# Altium PCB Tfinal.PcbDoc (part 3 of 3)
Units mm, origin at the board's own origin, x right, y up, seen from the top; angles counter-clockwise.
Board outline 152.4 x 101.6 mm, 2 copper layers (Top Layer, Bottom Layer); 134 components, 112 nets, 404 pads, 12 vias.
Unrouted connection lines stored in the file: 100.
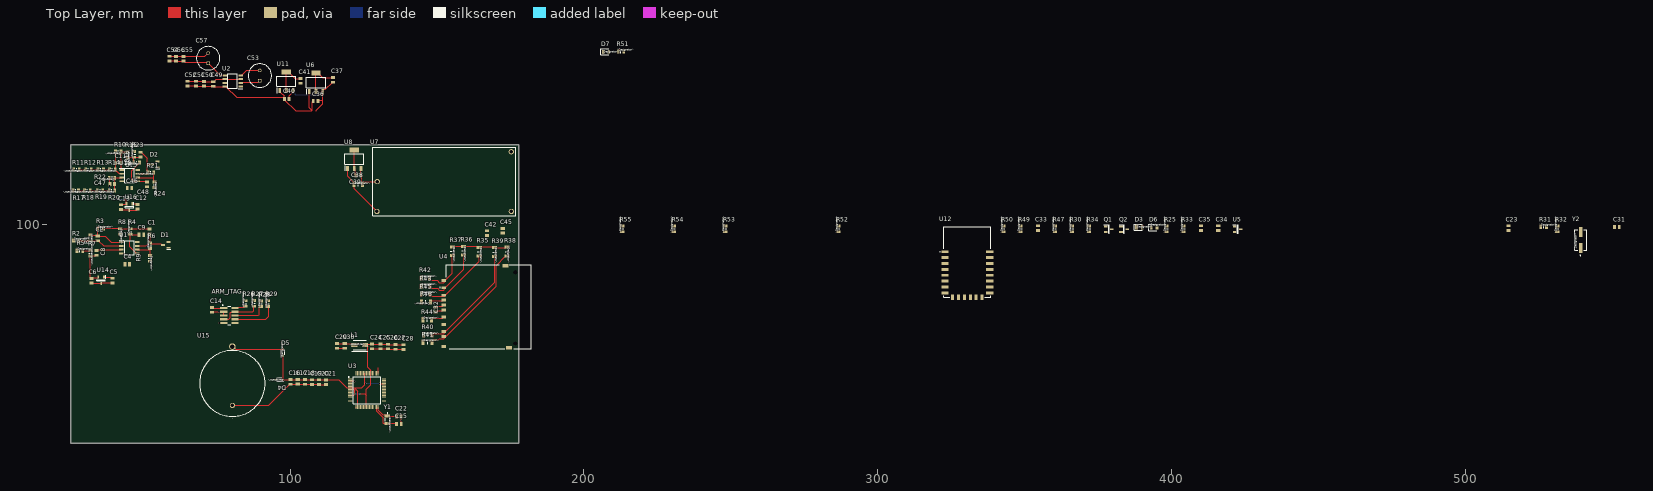
[diagram p0: Top Layer view]

## Via types
v1: diameter 0.6, hole 0.6, Top Layer to Bottom Layer, tented top, 7 vias
v2: diameter 0.6, hole 0.406, Top Layer to Bottom Layer, tented top, 5 vias

## Nets (pads, with @x,y where several pads share a name; then routed paths per layer and width w, separated by ;. In a path a pad name is that pad's centre, name@x,y a point inside that pad or via, vN(x,y) a via of type N, cw(c..) or ccw(c..) an arc to the next point about the centre after c; other vN are vias at no path point) (continued)
NetC24_23: (continued)
  Top Layer w0.254: U3.12 121.616,41.728 121.996,42.108 121.996,43.409 121.677,43.728 121.424,43.728 U3.8 ; v2(123.8,42.266) 125.425,42.266 125.986,41.705 ; U3.24 125.986,41.705 ; C28.1 135.992,58.922 C27.1 133.426,58.998 C26.1 130.785,59.125 C25.1 127.965,59.176 C24.1 125.851,59.151 L1.1 125.977,58.826 126.475,58.328 126.475,51.345 127.486,50.334 U3.54 127.486,45.317 125.986,43.817 125.986,41.705
  Bottom Layer w0.254: v2(122.149,42.266) v2(123.8,42.266)
NetC29_23: C29.1 C30.1 L1.2 U3.64 | length 6.1
  Top Layer w0.254: C29.1 118.587,59.34 C30.1 121.344,59.309 L1.2
NetC47_22: C47.2 R20.1 R22.1 U13.3 | length 6.8
  Top Layer w0.254: R20.1 40.381,113.599 C47.2 40.315,115.626 R22.1 40.513,115.824 U13.3
NetC48_22: C48.2 R16.1 U13.5 | length 12.8
  Top Layer w0.254: R16.1@49.116,120.556 R16.1 48.768,120.679 46.228,118.139 46.228,115.24 46.914,114.554 U13.5 51.105,114.554 C48.2
NetC53_24: C53.2 U2.4 | length 7.3
  Top Layer w0.254: U2.4 83.617,150.571 85.288,152.242 C53.2
NetC53_25: C53.1 U2.2 | length 6.9
  Top Layer w0.254: U2.2 83.617,148.031 83.855,148.269 89.265,148.269 C53.1
NetD3_1: D3.1 Q1.3
NetD3_2: D3.2 R25.2
NetD5_2: D5.2 U15.2 | length 17.6
  Top Layer w0.254: U15.2 80.704,58.303 81.613,57.395 D5.2
NetD6_1: D6.1 Q2.3
NetD6_2: D6.2 R33.1
NetD7_2: D7.2 R51.1
NetQ1_1: Q1.1 R30.2
NetQ2_1: Q2.1 R34.2
NetR6_1: R6.1 R9.1 U1.6 | length 6.9
  Top Layer w0.254: U1.6 48.09,91.321 52.027,91.321 R6.1 R9.1
NetR11_1: R11.1 R12.2 | length 2.2
  Top Layer w0.254: R11.1 R12.2
NetR12_1: R12.1 R13.2 | length 2.3
  Top Layer w0.254: R12.1 R13.2
NetR13_1: R13.1 R14.2 | length 2
  Top Layer w0.254: R13.1 R14.2
NetR17_1: R17.1 R18.2 | length 2
  Top Layer w0.254: R17.1 R18.2
NetR18_1: R18.1 R19.2 | length 2.4
  Top Layer w0.254: R18.1 R19.2
NetR19_1: R19.1 R20.2 | length 2.2
  Top Layer w0.254: R19.1 R20.2
NetR21_1: R21.1 R24.1 U13.6 | length 8.8
  Top Layer w0.254: U13.6 48.209,115.748 53.614,115.748 ; R21.1 53.614,115.748 ; R24.1 53.614,114.686 53.614,115.748
NetR31_2: R31.2 U3.50
NetR32_2: R32.2 U3.40
NetR35_2: R35.2 R45.2 U4.2 | length 24.1
  Top Layer w0.254: R45.2 147.65,75.763 148.023,75.39 150.434,75.39 150.468,75.356 152.595,75.356 152.595,75.606 164.389,87.4 R35.2
NetR36_2: R36.2 R43.2 U4.1 | length 20.6
  Top Layer w0.254: R43.2 147.599,78.481 147.972,78.108 150.266,78.108 150.841,77.533 151.972,77.533 152.222,77.533 152.595,77.906 152.595,78.156 159.055,84.616 R36.2 R36.2@159.428,89.795
NetR37_2: R37.2 R42.2 U4.9 | length 16.5
  Top Layer w0.254: R42.2@147.577,81.546 147.577,81.171 147.896,80.851 150.023,80.851 150.841,80.033 151.972,80.033 152.222,80.033 152.595,80.406 152.595,80.656 155.253,83.315 R37.2 R37.2@155.627,88.885
NetR38_2: R38.2 R41.2 U4.8 | length 42.4
  Top Layer w0.254: R41.2@148.57,59.549 R41.2 148.313,60.181 148.686,60.554 150.487,60.554 150.841,60.908 151.972,60.908 152.222,60.908 170.129,78.815 170.129,85.807 173.463,89.14 R38.2
NetR39_2: R39.2 R40.2 U4.7 | length 37.9
  Top Layer w0.254: R40.2@148.621,62.038 R40.2 148.677,62.608 151.972,62.608 152.222,62.608 152.595,62.981 152.595,63.231 169.621,80.257 R39.2
NetR44_2: R44.2 U4.5 | length 4
  Top Layer w0.254: R44.2 148.728,67.97 U4.5@151.972,67.97
NetR46_1: R46.1 U4.CD1 | length 4.4
  Top Layer w0.254: R46.1 148.274,73.965 U4.CD1@151.972,73.965
NetR47_1: R47.1
NetR49_2: R49.2
NetR50_2: R50.2
NetR52_1: R52.1 U12.1
NetR53_1: R53.1 U12.3
NetR54_2: R54.2 U12.18
NetR55_2: R55.2 U12.16
PA0: U3.48
PA1: U3.47
PA2: U3.44
PA3: U3.43
PA4: U3.36
PA5: U3.35
PA6: U3.34
PA15: U3.20
PA23: U3.15
PB8: U3.61
PB9: U3.62
RESET: ARM_JTAG.10 U3.39
"SD CD": R46.2 U3.25
"SD MCCDA": R45.1 U3.38
"SD MCCK": R44.1 U3.41
"SD MCDA0": R40.1 U3.42 | length 0.4
  Top Layer w0.254: R40.1 R40.1@145.364,62.67
"SD MCDA1": R41.1 U3.52
"SD MCDA2": R42.1 U3.26
"SD MCDA3": R43.1 U3.37 | length 0.9
  Top Layer w0.254: R43.1@144.226,78.108 144.599,78.481 R43.1
"SPI MISO": U3.27
"SPI MOSI": U3.22
"SPI NPCS0": U3.28
"SPI SPCK": U3.21
TCK: ARM_JTAG.4 ARM_JTAG.7 R27.1 U3.53 | length 13.1
  Top Layer w0.254: ARM_JTAG.7 77.47,67.64 79.175,67.64 79.581,68.046 79.581,69.771 79.764,69.953 80.323,69.953 ARM_JTAG.4@80.525,70.155 ; ARM_JTAG.4 87.274,70.155 87.681,70.561 R27.1
TDI: ARM_JTAG.8 R29.1 U3.33 | length 15.3
  Top Layer w0.254: ARM_JTAG.8 91.669,67.615 92.761,68.707 92.761,71.658 R29.1
TDO: ARM_JTAG.6 R28.1 U3.49 | length 13
  Top Layer w0.254: ARM_JTAG.6 89.234,68.885 89.47,69.121 89.47,71.564 R28.1@89.818,71.912 ; U3.49 129.986,51.091
TGND: R17.2
TMS: ARM_JTAG.2 R26.1 U3.51 | length 3.7
  Top Layer w0.254: ARM_JTAG.2 81.586,71.666 84.412,71.666 R26.1
"UART URXD0": U3.30 U12.22
"UART URXD1": U3.5
"UART UTXD0": U3.29 U12.21
"UART UTXD1": U3.6
"USB DDM": R49.1 U3.56
"USB DDP": R50.1 U3.57
"USB VBUS": R47.2 U3.59
pads on no net: C23.1 C23.2 C31.1 C31.2 C33.1 C33.2 C34.1 C34.2 C35.1 C35.2 C42.1 C42.2 C45.1 C45.2 U2.1 U2.7 U4.MH1 U4.MH2 U4.WP1 U7.1 U7.2 U12.2 U12.4 U12.5 U12.6 U12.7 U12.9 U12.10 U12.11 U12.12 U12.13 U12.14 U12.17 U12.19 U12.20 Y2.1 Y2.2